# Altium PCB PCB_2021-11-04.pcbdoc
Units mil, origin at the board's own origin, x right, y up, seen from the top; angles counter-clockwise.
Board outline 4580 x 2695 mil, 2 copper layers (Top Layer, Bottom Layer); 44 components, 37 nets, 165 pads, 207 vias.
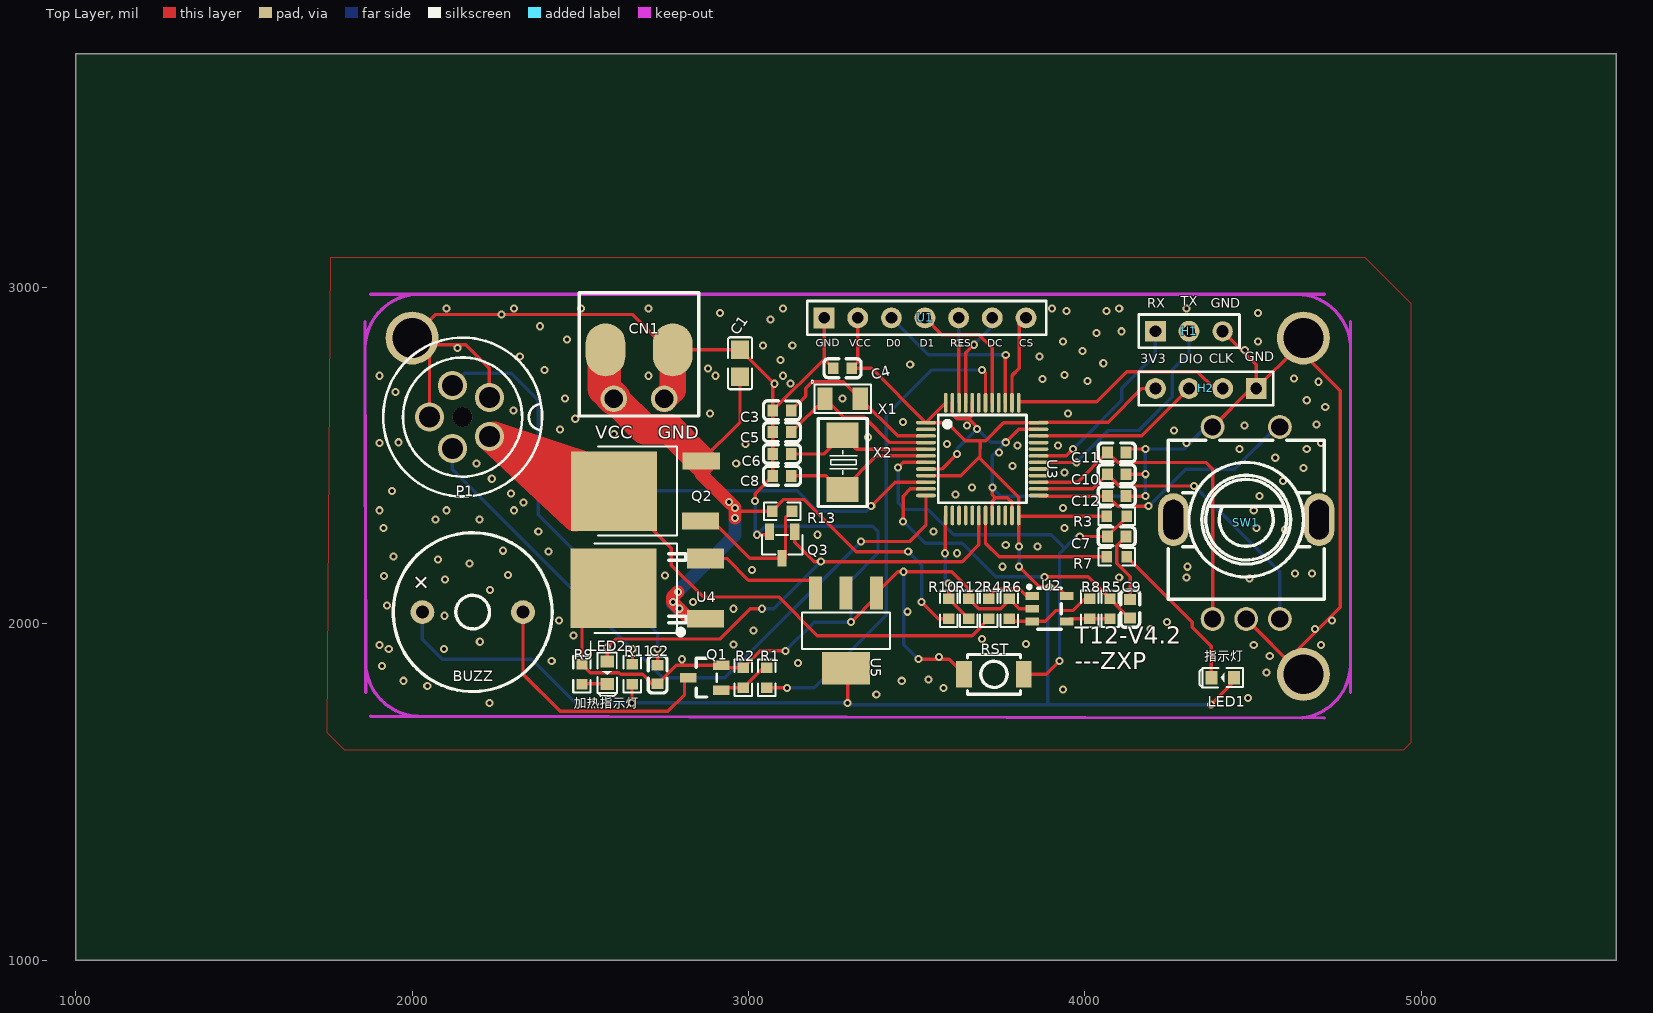
[diagram p0: Top Layer view]
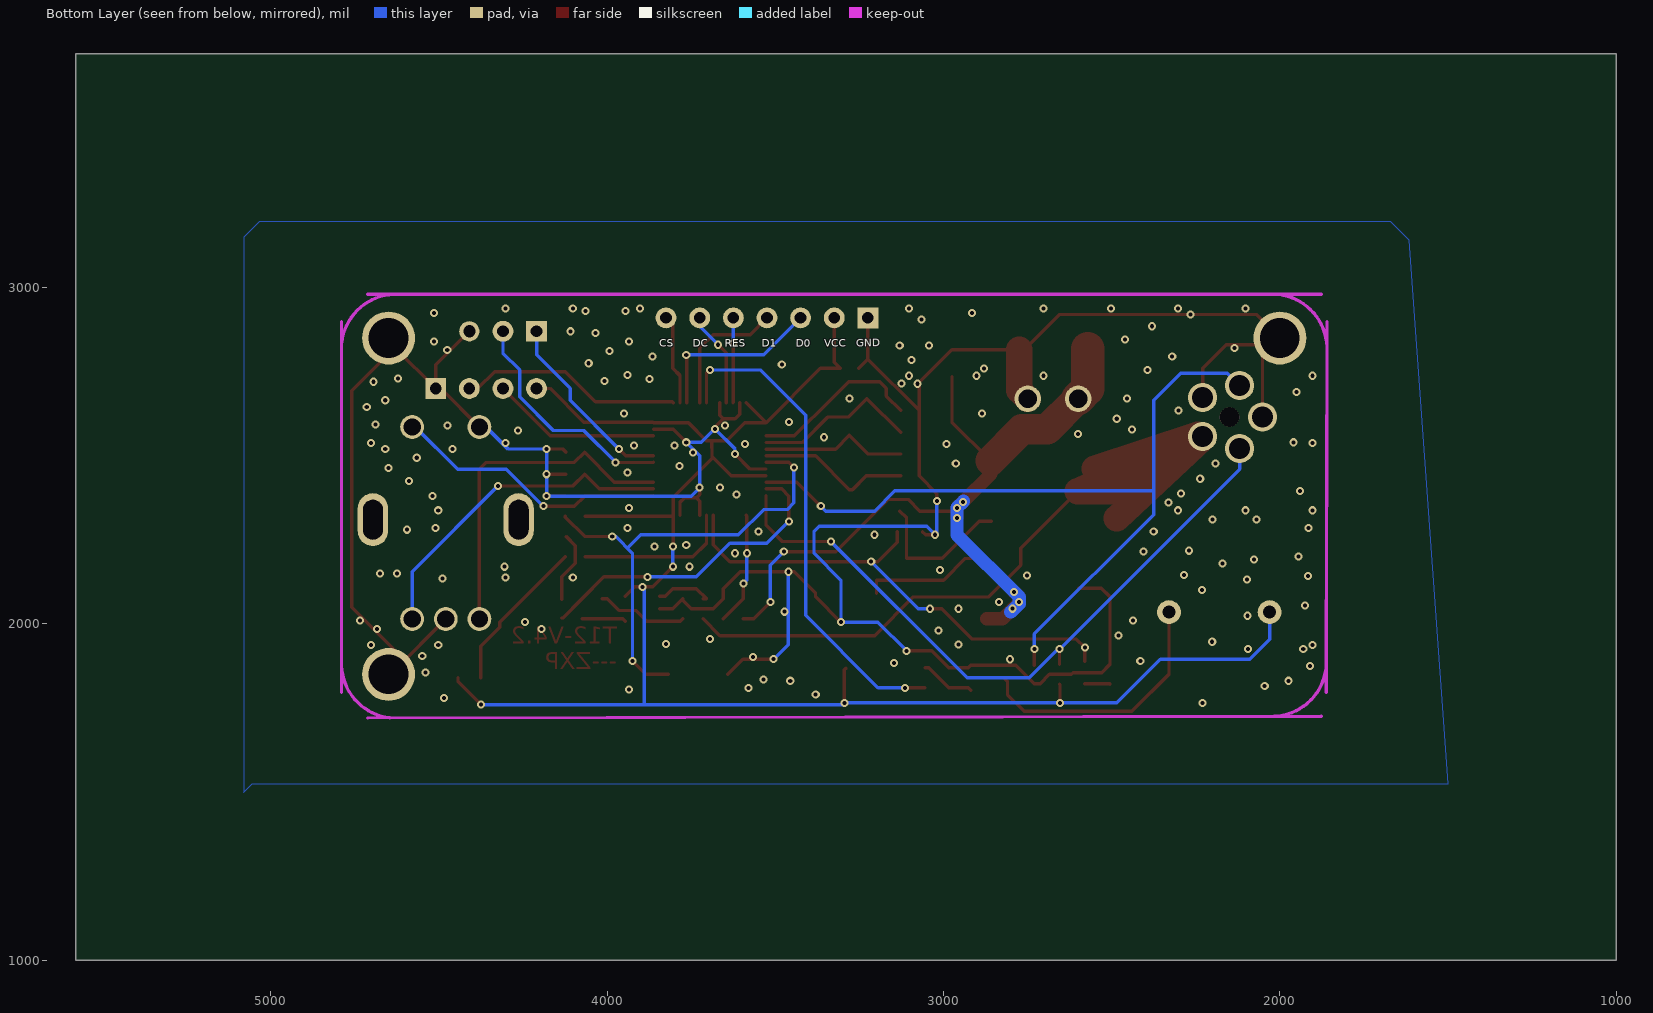
[diagram p1: Bottom Layer view, seen from below]

## Layer stack, top to bottom
Top Layer: signal copper (thickness not stored)
Dielectric: dielectric 12.6, FR-4, Dk 4.8
Bottom Layer: signal copper (thickness not stored)

## Board outline
5580,1000 1000,1000 1000,3695 5580,3695

## Components (designator, comment, footprint, x,y, rotation, side; value= is the part's Value field where it differs from the comment)
BUZZ "TMB12A12" BUZ-TH_BD12.0-P7.60-D0.6-FD 2180,2035 r0 top
C1 "10u" C0805 2975,2775 r270 top
C2 "0.1u" C0603 2730,1850 r90 top
C3 "10p" C0603 3100,2635 r0 top
C4 "0.1u" C0603 3280,2760 r0 top
C5 "10p" C0603 3100,2570 r0 top
C6 "10p" C0603 3100,2505 r0 top
C7 "0.1u" C0603 4095,2260 r0 top
C8 "10p" C0603 3100,2440 r0 top
C9 "0.1u" C0603 4135,2045 r270 top
C10 "0.1u" C0603 4095,2445 r0 top
C11 "0.1u" C0603 4095,2510 r180 top
C12 "0.1u" C0603 4095,2380 r0 top
CN1 "31382102" CONN-TH_2P-P3.81_31382102 2674.5,2669.4 r0 top
H1 "HDR-F-2.54" HDR-F-2.54_1X3 4310,2870 r0 top
H2 "HDR-F-2.54" HDR-F-2.54_1X4 4360,2700 r180 top
LED1 "0805_B" LED0603_BLUE 4410,1840 r180 top
LED2 "0805" LED0603_GREEN 2580,1855 r270 top
P1 "GX12-5" GX12-5 2150,2615 r270 top
Q1 "S8050" SOT-23-3_L2.9-W1.3-P1.90-LS2.4-TR 2870,1840 r0 top
Q2 "WSF45P06" TO-252-2_L6.6-W6.1-P4.57-LS9.9-TL-CW 2730,2395 r180 top
Q3 "2N7002" SOT-23-3_L2.9-W1.3-P1.90-LS2.4-BR 3100,2235 r90 top
R1 "1k" R0603 3055,1840 r90 top
R2 "10k" R0603 2985,1840 r270 top
R3 "10k" R0603 4095,2320 r180 top
R4 "10k" R0603 3715,2045 r90 top
R5 "10k" R0603 4075,2045 r90 top
R6 "1k" R0603 3775,2045 r270 top
R7 "1k" R0603 4095,2200 r0 top
R8 "100k" R0603 4015,2045 r270 top
R9 "1k" R0603 2505,1850 r270 top
R10 "200k" R0603 3595,2045 r270 top
R11 "10k" R0603 2655,1850 r90 top
R12 "10k" R0603 3655,2045 r270 top
R13 "10k" R0603 3100,2335 r180 top
RST "TSA343G00-250J2" SW-SMD_L4.0-W2.9-LS5.0 3730,1850 r0 top
SW1 "EC11" SW-TH_EC11XXXXXXXX 4480,2300 r0 top
U1 "OLED" HDR-M-2.54_1X7 3525,2910 r0 top
U2 "SGM321YN5/TR" SOT-23-5_L3.0-W1.7-P0.95-LS2.8-BR 3895,2045 r180 top
U3 "STM32F103C8T6" LQFP-48_L7.0-W7.0-P0.50-LS9.0-BL 3695,2490 r270 top
U4 "78M05" TO-252-2_L6.5-W6.1-P4.58-LS10.0-TL 2735,2105 r180 top
U5 "AMS1117-3.3V" SOT-223-4_L6.5-W3.5-P2.30-LS7.0-BR 3290,1980 r90 top
X1 "32.768KHz" OSC-SMD_2P-L3.2-W1.5 3280,2670 r0 top
X2 "8M" OSC-SMD_L5.0-W3.2 3280,2480 r90 top

## Footprints (in the part's own frame and the unit in brackets; to place one, negate y for a bottom-side part, rotate by r counter-clockwise, add the part's x,y. Pads: shape width x height; smd on the part's side, far side on the other; paste and mask are expansions set on the pad)
BUZ-TH_BD12.0-P7.60-D0.6-FD [mm]
  round 1.8 hole 1: 1(-3.8,0) 2(3.8,0)
  silkscreen extent -6,-6 6,6
C0603 [mm]
  rect 0.8x0.9 smd: 1(-0.7,0) 2(0.7,0)
  silkscreen extent -1.41,-0.71 1.39,0.72
C0805 [mm]
  rect 1.41x1.35 smd: 1(-1.03,0) 2(1.03,0)
  silkscreen extent -1.96,-0.9 1.96,0.9
CONN-TH_2P-P3.81_31382102 [mm]
  round 2 hole 1.4: 1(-1.905,0) 2(1.905,0)
  silkscreen extent -4.5,-1.3 4.5,8
GX12-5 [mm]
  round 2.2 hole 1.6: 1(1.471,2.022) 2(2.377,-0.772) 3(0,-2.499) 4(-2.377,-0.772) 5(-1.471,2.022)
  round 1.5 hole 1.5 unplated: ""(0,0)
  silkscreen extent -6,-6 6,6
HDR-F-2.54_1X3 [mil]
  rect 62x62 hole 35: 1(-100,0)
  round 62 hole 35: 2(0,0)
  round 60 hole 36: 3(100,0)
  silkscreen extent -150,-49 150,50
HDR-F-2.54_1X4 [mil]
  rect 62x62 hole 35: 1(-150,0)
  round 62 hole 35: 2(-50,0) 3(50,0) 4(150,0)
  silkscreen extent -200,-50 200,50
HDR-M-2.54_1X7 [mil]
  rect 62x62 hole 35: 1(-300,0)
  round 62 hole 35: 2(-200,0) 3(-100,0) 4(0,0) 5(100,0) 6(200,0) 7(300,0)
  silkscreen extent -350,-50 360,50
LED0603_BLUE [mm]
  rect 0.9x1 smd: 1(-0.85,0) 2(0.85,0)
  silkscreen extent -1.54,-0.73 1.75,0.73
LED0603_GREEN [mm]
  rect 0.9x1 smd: 1(-0.85,0) 2(0.85,0)
  silkscreen extent -1.54,-0.73 1.75,0.73
LQFP-48_L7.0-W7.0-P0.50-LS9.0-BL [mm]
  oval 0.27x1.5 smd: 1(-2.75,-4.25) 2(-2.25,-4.25) 3(-1.75,-4.25) 4(-1.25,-4.25) 5(-0.75,-4.25) 6(-0.25,-4.25) 7(0.25,-4.25) 8(0.75,-4.25) 9(1.25,-4.25) 10(1.75,-4.25) 11(2.25,-4.25) 12(2.75,-4.25) 25(2.75,4.25) 26(2.25,4.25) 27(1.75,4.25) 28(1.25,4.25) 29(0.75,4.25) 30(0.25,4.25) 31(-0.25,4.25) 32(-0.75,4.25) 33(-1.25,4.25) 34(-1.75,4.25) 35(-2.25,4.25) 36(-2.75,4.25)
  oval 1.5x0.27 smd: 13(4.25,-2.75) 14(4.25,-2.25) 15(4.25,-1.75) 16(4.25,-1.25) 17(4.25,-0.75) 18(4.25,-0.25) 19(4.25,0.25) 20(4.25,0.75) 21(4.25,1.25) 22(4.25,1.75) 23(4.25,2.25) 24(4.25,2.75) 37(-4.25,2.75) 38(-4.25,2.25) 39(-4.25,1.75) 40(-4.25,1.25) 41(-4.25,0.75) 42(-4.25,0.25) 43(-4.25,-0.25) 44(-4.25,-0.75) 45(-4.25,-1.25) 46(-4.25,-1.75) 47(-4.25,-2.25) 48(-4.25,-2.75)
  silkscreen extent -3.33,-3.31 3.3,3.34
OSC-SMD_2P-L3.2-W1.5 [mm]
  rect 1.15x1.7 smd: 1(-1.325,0) 2(1.325,0)
  silkscreen extent -2.39,-1.08 2.13,1.37
OSC-SMD_L5.0-W3.2 [mm]
  rect 1.9x2.4 smd: 1(-2.05,0) 2(2.05,0)
  silkscreen extent -3.32,-1.85 3.33,1.85
R0603 [mil]
  rect 31.75x34.02 smd: 1(-29.65,0) 2(29.65,0)
  silkscreen extent -55,-26 55,26
SOT-23-3_L2.9-W1.3-P1.90-LS2.4-BR [mm]
  rect 1.25x0.7 smd: 1(1,-0.95) 2(1,0.95) 3(-1,0)
  silkscreen extent -0.73,-1.53 0.73,1.53
SOT-23-3_L2.9-W1.3-P1.90-LS2.4-TR [mm]
  rect 1.25x0.7 smd: 1(1.25,0.95) 2(1.25,-0.95) 3(-1.25,0)
  silkscreen extent -0.65,-1.46 0.9,1.46
SOT-23-5_L3.0-W1.7-P0.95-LS2.8-BR [mm]
  rect 1x0.6 smd: 1(1.3,-0.95) 2(1.3,0) 3(1.3,0.95) 4(-1.3,0.95) 5(-1.3,-0.95)
  silkscreen extent -0.9,-1.78 1.65,1.55
SOT-223-4_L6.5-W3.5-P2.30-LS7.0-BR [mm]
  rect 2.47x0.98 smd: 1(2.835,-2.3) 2(2.835,0) 3(2.835,2.3)
  rect 2.47x3.6 smd: 4(-2.835,0)
  silkscreen extent -1.37,-3.33 1.37,3.33
SW-SMD_L4.0-W2.9-LS5.0 [mm]
  rect 1.2x2 smd: 1(-2.25,0) 2(2.25,0)
  silkscreen extent -2,-1.5 2,1.5
SW-TH_EC11XXXXXXXX [mm]
  oval 2.3x4 hole 1.5 slot 3 at 90 deg: 6(5.5,0.25) 7(-5.5,0.25)
  round 1.8 hole 1.3: A(-2.54,-7.25) B(2.54,-7.25) C(0,-7.25) D(-2.54,7.25) E(2.54,7.25)
  silkscreen extent -5.9,-5.75 5.9,6.25
TO-252-2_L6.5-W6.1-P4.58-LS10.0-TL [mm]
  rect 2.8x1.35 smd: 1(-3.475,2.275)
  rect 2.8x1.5 smd: 3(-3.475,-2.275)
  rect 6.5x6 smd: 4(3.475,-0.017)
  silkscreen extent -2.01,-3.39 4.9,3.48
TO-252-2_L6.6-W6.1-P4.57-LS9.9-TL-CW [mm]
  rect 2.8x1.3 smd: 1(-3.251,2.273) 3(-3.292,-2.273)
  rect 6.5x6 smd: 2(3.292,0)
  silkscreen extent -1.46,-3.35 4.51,3.34

## Free pads (board coordinates)
  round 157.48 hole 118.11: 1(2000,2850) 1(4650,1850) 1(4650,2850)
  oval 118.11x157.48 smd: 3(2775,2815) 4(2575,2815)

## Via types
v1: diameter 24, hole 12, Top Layer to Bottom Layer, 182 vias
v2: diameter 24.02, hole 12.01, Top Layer to Bottom Layer, 25 vias

## Nets (pads, with @x,y where several pads share a name; then routed paths per layer and width w, separated by ;. In a path a pad name is that pad's centre, name@x,y a point inside that pad or via, vN(x,y) a via of type N, cw(c..) or ccw(c..) an arc to the next point about the centre after c; other vN are vias at no path point)
+3V3: BUZZ.1 C4.2 H2.4 LED1.1 R3.2 R11.1 U1.2 U2.5 U3.1 U3.9 U3.24 U3.36 U3.48 U5.4 | length 5486.6
  Top Layer w10: v1(2653.84,1765) 2653.84,1819.18 R11.1 ; U5.4 3295,1863.39 v1(3295,1765) ; U1.2 3325,2777.44 C4.2 3365.95,2760 U3.1 U3.48 ; U3.9 3630.79,2440.79 3688.61,2498.61 ; U3.1 3591.7,2598.3 3645,2545 3705,2545 3758.3,2598.3 U3.36 ; 3689,2545 3688.61,2498.61 ; v1(3805,2170) 3865,2110 v1(3895,2110) 3918.6,2110 U2.5 ; v1(3805,2230) 3803.27,2231.73 U3.24 ; U3.36 3864.05,2600 4070,2600 4170,2700 H2.4 ; R3.2 3805.95,2320 U3.24 ; v1(4375,1760) 4443.47,1828.47 LED1.1 ; 3688.61,2498.61 3688.61,2491.39 3803.27,2376.73 U3.24
  Bottom Layer w10: BUZZ.1 2030.4,1954.6 2090,1895 2355,1895 2415,1835 2485,1765 v1(2653.84,1765) v1(3295,1765) 3300,1760 v1(4375,1760) ; v1(3805,2170) v1(3805,2230) ; 3875.9,1760 3890,1760 3890,2105 v1(3895,2110)
+5V: U4.3 U5.3 | length 392.8
  Top Layer w10: U4.3 2935.4,2194.6 3000,2130 3199.4,2130 U5.3
BUZZ: R1.1 U3.42 | length 1481.7
  Top Layer w10: R1.1 v1(3115,1810) ; v1(3695,2755) 3704.84,2745.16 U3.42
  Bottom Layer w10: v1(3115,1810) 3195,1810 3410,2025 3410,2620 3545,2755 v1(3695,2755)
BUZZ_2: BUZZ.2 Q1.3 | length 785.9
  Top Layer w10: BUZZ.2 2329.6,1850.4 2440,1740 2760,1740 2810,1790 2810,1829.2 Q1.3
CTRL-WSF: Q2.1 Q3.3 R13.1 | length 445.1
  Top Layer w10: Q2.1 2894.5,2305.5 3004.4,2195.6 Q3.3 3110,2195.6 3110,2315.3 R13.1
EC-CLK: C10.1 SW1.B U3.26 | length 996.3
  Top Layer w10: U3.26 4023.86,2401.42 C10.1 4102.44,2410 v1(4325,2410)
  Bottom Layer w10: v1(4325,2410) 4580,2155 SW1.B
EC-DT: C11.2 SW1.A U3.27 | length 1020.7
  Top Layer w10: U3.27 3978.54,2421.1 C11.2 4097.44,2480 4360,2480 4380,2460 SW1.A
EC-SW: C12.1 SW1.E U3.25 | length 828.3
  Top Layer w10: U3.25 3864.05,2380 C12.1 4097.44,2350 v1(4190,2350)
  Bottom Layer w10: v1(4190,2350) 4300,2460 4445,2460 4570.43,2585.43 SW1.E
GND: C1.1 C2.1 C3.1 C4.1 C5.1 C6.1 C7.2 C8.1 C9.1 C10.2 C11.1 C12.2 CN1.2 H1.3 H2.1 P1.3 P1.5 pad.1 pad.3 Q1.1 Q3.2 R2.1 R6.1 R9.1 R12.1 RST.1 SW1.C SW1.D U1.1 U2.2 U3.8 U3.20 U3.23 U3.35 U3.44 U3.47 U4.4 U5.1 | length 9897.9
  Top Layer w10: P1.3 2051.6,2798.4 pad.1@2000,2850 ; P1.5 2229.6,2760.4 2160,2830 2020,2830 pad.1@2000,2850 ; R9.1 2529.66,1855 2615,1855 2620,1850 2685,1850 2712.56,1822.44 C2.1 2784.96,1877.4 Q1.1 2926.94,1869.66 R2.1 3035.34,1920 v1(3110,1920) ; R9.1 2505,2080 2530.7,2105.7 U4.4 ; C1.1@2975,2815.5 pad.3 2760,2815 2655,2920 v1(2265.26,2920) 2070,2920 pad.1@2000,2850 ; C1.1 3072.44,2718.11 C3.1 C8.1 3020,2387.56 v1(3020,2365) ; v1(3025,2265) 3053.23,2265 Q3.2 ; C3.1 3225,2787.4 ; U1.1 3225,2787.44 C4.1 ; v1(3305,2005) 3380.55,2080.55 U5.1 3443.94,2155 v1(3461.53,2155) 3605,2155 3655,2105 R12.1 3684.66,2045 3750,2045 3775,2070 R6.1 3804.66,2045 U2.2 ; v1(3505,1895) 3596.42,1895 RST.1 ; U3.8 3575.47,2460.47 v1(3620,2505) ; U3.47 3606.42,2623.58 3620,2610 3655,2610 ; U3.44 3665.47,2620.47 3655,2610 ; v1(3680,2580) 3680,2585 3655,2610 ; U3.20 3724.53,2365 3734.53,2375 ; v1(3725,2405) 3725,2384.53 3734.53,2375 ; v1(3765,2540) 3803.58,2578.58 U3.35 ; U3.23 3783.58,2361.42 3770,2375 3734.53,2375 ; C7.2 4095,2232.44 4095,2180 4135,2140 C9.1 ; C12.2 v1(4180,2380) ; C10.2 v1(4180,2445) ; C11.1 4132.56,2520 v1(4180,2520) ; SW1.D 4494.57,2700 H2.1 ; H1.3 4510,2770 H2.1 ; SW1.C 4633.31,1861.25 4633.31,1850 4633.31,1923.31 4760,2050 4760,2693.03 4633.31,2819.72 4629.72,2819.72 H2.1
  Top Layer w78.74: CN1.2 2775,2694.9 pad.3
  Bottom Layer w10: v1(3020,2365) 3020,2270 v1(3025,2265) 3050,2290 3370,2290 3385,2275 3385,2210 3305,2130 v1(3305,2005) 3195,2005 v1(3110,1920) ; v1(3461.53,2155) 3461.53,1938.47 v1(3505,1895) ; v1(3620,2505) 3620,2520 v1(3680,2580) 3720,2540 v1(3765,2540) 3725,2500 v1(3725,2405) 3750,2380 v1(4180,2380) v1(4180,2445) v1(4180,2520) 4295,2520 4360.43,2585.43 SW1.D
  other v1: 2230,1765 4485,1780 3380,1790 3935,1805 3580,1810 2045,1815 1974.41,1830.86 3455.74,1830.86 3535,1835 4540,1855 1910,1875 3147.74,1884.2 2415,1890 2802.41,1894.86 3566.41,1901.53 4550,1905 2095,1925 1930.41,1925.53 2955.74,1938.86 3825,1940 2201.08,1946.86 3695,1955 3015,1980 4195,1985 4685,1985 4245,2005 2437.08,2009.53 4735,2010 2095.74,2024.2 3473.08,2036.2 2955,2045 1925,2055 2835,2065 2231.74,2100.2 2097.08,2132.2 4490,2135 1915.74,2142.86 2751.74,2144.2 2285,2145 4625,2150 4675,2150 3010,2160 3755,2170 4305,2170 2170,2180 2077.08,2190.86 1945,2200 3620,2210 2405,2215 2270.41,2217.53 3860,2230 3765,2235 3205,2265 2375,2275 3550,2275 4595,2280 1915,2285 3940,2285 4510,2285 2070,2310 2200,2310 3935,2345 2330.5,2361.5 4520,2380 3615,2385 2293.74,2387.53 1940,2395 3665,2405 4590,2425 2236.74,2431.53 3940,2450 4650.27,2463.39 3785,2470 2191.74,2476.53 2963.6,2476.72 4566.27,2494.05 3745,2510 4460,2520 4660,2520 3800,2530 3920,2530 2990.6,2534.72 3590,2535 1960,2540 3355,2555 2600,2565 4265,2575 2439.82,2578.33 3650,2590 4475,2590 4688.94,2592.72 3460,2600 2485,2610 2885,2625 3950,2625 2300.74,2634.53 4715,2645 4660,2665 2455,2670 3280,2670 1950,2690 3076.94,2714.05 3124.94,2715.39 4695,2720 4007.6,2722.05 3874.27,2728.72 4622.27,2730.05 3940,2740 2393.74,2755.53 2880,2760 3480.94,2771.39 4055,2775 3095,2785 2320,2795 3865,2795 3992.94,2811.39 4475.6,2814.05 2135,2820 3043.6,2827.39 3130.27,2827.39 3935,2840 4515,2840 2460,2845 4035,2865 4108.94,2870.05 2380,2885 3065,2905 2915,2925 4515,2925 3945,2930 4065,2930
  other v2: 1902.37,1937.79 4502.37,1937.79 4702.37,1937.79 2480,1965 4102.37,2137.79 4302.37,2137.79 1902.37,2337.79 2102.37,2337.79 2302.37,2337.79 4502.37,2337.79 1902.37,2537.79 4302.37,2537.79 4702.37,2537.79 1902.37,2737.79 2702.37,2737.79 2902.37,2737.79 3102.37,2737.79 2102.37,2937.79 2302.37,2937.79 2502.37,2937.79 2702.37,2937.79 3102.37,2937.79 3902.37,2937.79 4102.37,2937.79 4302.37,2937.79
HEATPWM: LED2.1 Q3.1 U3.18 | length 1493.9
  Top Layer w10: LED2.1 v1(2580,1930) 2605,1955 2915,1955 3005,2045 v1(3040,2045) ; Q3.1 3137.4,2242.6 3195,2185 3635,2185 3685.2,2235.2 U3.18
  Bottom Layer w10: v1(3040,2045) 3075,2045 v1(3215,2185)
LED: R7.1 U3.19 | length 459.7
  Top Layer w10: U3.19 3704.8,2240.2 3745,2200 R7.1
LED1_2: LED1.2 R7.2 | length 464.3
  Top Layer w10: R7.2 4320,2004.7 4320,1989.5 4376.5,1933 LED1.2
LED2_2: LED2.2 R9.2 | length 75.5
  Top Layer w10: R9.2 2506.2,1821.54 LED2.2
NRST: C7.1 R3.1 RST.2 U3.7 | length 1429.7
  Top Layer w10: v1(3445,2465) 3460.16,2480.16 U3.7 ; RST.2 3885,1850 v1(3925,1890) ; v1@3990,2260 C7.1 4124.66,2317.22 R3.1
  Bottom Layer w10: v1(3445,2465) 3445,2360 3465,2340 3535,2340 3610,2265 3900,2265 3940,2225 ; v1(3925,1890) 3925,2210 3975,2260 v1(3985,2260)
NTC: P1.2 R11.2 U3.12 | length 2047.9
  Top Layer w10: R11.2 v1(2655,1925) ; v1(3335,2245) 3480,2245 3527.7,2292.7 U3.12
  Bottom Layer w10: P1.2 2119.6,2460.4 v1(2655,1925) 2660,1925 2745,1840 2930,1840 v1(3335,2245)
OLED-CS: U1.7 U3.38 | length 269.8
  Top Layer w10: U3.38 3783.58,2738.58 3805,2760 3805,2890 U1.7
OLED-DC: U1.6 U3.45 | length 285.5
  Top Layer w10: U3.45 3645.79,2805.79 v1(3670,2830)
  Bottom Layer w10: v1(3670,2830) 3725,2885 U1.6
OLED-RST: U1.5 U3.46 | length 253.1
  Top Layer w10: v1(3625,2835) 3625,2658.42 U3.46
  Bottom Layer w10: v1(3625,2835) U1.5
OLED-SCK: U1.3 U3.39 | length 528.7
  Top Layer w10: U3.39 3763.9,2798.9 v1(3765,2800)
  Bottom Layer w10: U1.3 3535,2800 v1(3765,2800)
OLED-SDA: U1.4 U3.41 | length 399.8
  Top Layer w10: U1.4 3575,2860 3685,2860 3724.5,2820.5 U3.41
OSC32_IN: C3.2 U3.3 X1.2 | length 515.3
  Top Layer w10: C3.2 3170,2677.44 3170,2700 3190,2720 3282.17,2720 X1.2 3443.27,2558.9 U3.3
OSC32_OUT: C5.2 U3.4 X1.1 | length 495.6
  Top Layer w10: C5.2 X1.1 ; X1.1 3282.83,2615 3345,2615 3420.79,2539.21 U3.4
OSC_IN: C6.2 U3.5 X2.2 | length 440.2
  Top Layer w10: C6.2 3224.3,2505 X2.2 3321.18,2519.53 U3.5
OSC_OUT: C8.2 U3.6 X2.1 | length 458.6
  Top Layer w10: C8.2 3230,2440 3270.7,2399.3 X2.1 3380.55,2499.84 U3.6
Q1_2: Q1.2 R1.2 R2.2 | length 163.6
  Top Layer w10: Q1.2 2926.94,1810.34 R2.2 3044.32,1869.66 R1.2
R4_2: R4.2 U2.1 | length 171.4
  Top Layer w10: R4.2 3704.66,2074.66 3735,2105 3805,2105 3827.6,2082.4 U2.1
R6_2: R6.2 R8.1 U2.3 | length 271
  Top Layer w10: R6.2 3782.74,2007.6 U2.3 3882.6,2007.6 3915,2040 3965,2040 3999.66,2074.66 R8.1
R8_2: R5.1 R8.2 U2.4 | length 132
  Top Layer w10: U2.4 3953.93,2015.34 R8.2 R5.1
SW: C2.2 P1.4 U3.10 | length 2458.4
  Top Layer w10: C2.2 v1(2730,1925) ; v1(3365,2350) 3436.1,2421.1 U3.10
  Bottom Layer w10: P1.4 2156,2745 2295,2745 2375,2665 2375,2325 2730,1970 v1(2730,1925) ; 2375,2340 2375,2346.9 ; 2375,2395.4 3144.6,2395.4 3205,2335 3350,2335 v1(3365,2350)
SWCLK: H2.2 U3.37 | length 665.8
  Top Layer w10: U3.37 3805.95,2660 4035,2660 4125,2750 4335,2750 4385,2700 H2.2
SWDIO: H2.3 U3.34 | length 506.1
  Top Layer w10: U3.34 4168.9,2558.9 H2.3
T12+: P1.1 Q2.2 R4.1 | length 2704.3
  Top Layer w10: Q2.2 2770,2225.4 2770,2175 2865,2080 3090,2080 3205,1965 3664.7,1965 R4.1
  Top Layer w78.74: P1.1 Q2.2 2463.66,2395 2357.46,2501.2 ; P1.1@2230.82,2551.53 Q2.2@2484.36,2313.86 ; P1.1@2244.55,2563 Q2.2@2550.4,2462
T12-ADC: C9.2 R5.2 U3.11 | length 945.7
  Top Layer w10: v1(3460,2305) 3460,2380 3481.4,2401.4 U3.11 ; v1(3880,2140) 4009.66,2140 R5.2 4132.22,2017.44 C9.2
  Bottom Layer w10: v1(3460,2305) 3525,2240 3635,2240 3735,2140 v1(3880,2140)
UART-RX: H1.1 U3.31 | length 562.5
  Top Layer w10: U3.31 3944.84,2499.84 v1(3965,2520)
  Bottom Layer w10: v1(3965,2520) 4110,2665 4110,2700 4210,2800 H1.1
UART-TX: H1.2 U3.30 | length 694.2
  Top Layer w10: U3.30 v1(3975,2480)
  Bottom Layer w10: v1(3975,2480) 4070,2575 4160,2575 4260,2675 4260,2755 4310,2805 H1.2
VCC: C1.2 CN1.1 pad.4 Q2.3 R10.2 R13.2 U4.1 | length 2604.2
  Top Layer w10: Q2.3 2975,2599.88 C1.2 ; v1(2960,2345) 2970,2335 R13.2 3105.34,2370 3165,2370 3320,2215 v1(3475,2215) ; v1(3515,2065) 3564.66,2015.34 R10.2
  Top Layer w39.37: v1(2790,2095) 2775,2080 v1(2775,2065) v1(2794.9,2045.1) 2824.6,2015.4 U4.1 ; Q2.3 2859.6,2445.4 v1(2942.11,2362.89) v1(2960,2345) v1(2960,2315)
  Top Layer w78.74: pad.4 2575,2693.9 CN1.1
  Top Layer w90.55: CN1.1@2599.95,2668.07 2602.17,2668.07 2692.17,2578.07 2766.99,2578.07 Q2.3@2859.58,2485.48
  Top Layer w100: pad.4@2571.21,2817.71 2571.21,2699.14 CN1.1@2601.21,2669.14
  Bottom Layer w10: v1(3475,2215) 3515,2175 v1(3515,2065)
  Bottom Layer w39.37: v1@2800,2035 2775,2060 2775,2080 2960,2265 v1(2960,2345) v1@2940.34,2364.66
VIN-ADC: R10.1 R12.2 U3.13 | length 337.3
  Top Layer w10: v1(3585,2210) 3585,2320.95 U3.13 ; R10.1 v1(3595,2120) ; R10.1 R12.2
  Bottom Layer w10: v1(3585,2210) 3585,2130 v1(3595,2120)
pads on no net: P1. SW1.6 SW1.7 U3.2 U3.14 U3.15 U3.16 U3.17 U3.21 U3.22 U3.28 U3.29 U3.32 U3.33 U3.40 U3.43 U5.2

## Polygon pours and split planes (outlines as drawn)
GND on Bottom Layer (solid): 1615,3140 1670,3195 5035,3195 5080,3150 5080,1500 5055,1525 1500,1525
GND on Top Layer (solid): 1758.44,3090.5 4832.51,3090.5 4969.55,2953.46 4969.55,1646.05 4947.33,1623.83 1799.18,1623.83 1747.33,1675.68

## Keep-outs
Keep-Out Layer:
  lines w10: 1860,2825 cw(c2022,2818.26) 2002.98,2979.28 ; 1862.83,1867.98 ccw(c2023.86,1887) 2017.12,1725 ; 4635,2980 cw(c4628.26,2818) 4789.28,2837.02 ; 4647.02,1720.72 ccw(c4628,1881.74) 4790,1875

## Other copper
Top Layer:
  text "T12-V4.2 / ---ZXP" at 3970,1864.41 h51.18

## Silkscreen, mask and mechanical layers (free items; w line width, h text height)
Top Overlay:
  text "TX" at 4285,2935 h49.21
  text "RX" at 4185,2930 h49.21
  text "GND" at 4375,2930 h49.21
  text "GND" at 3200,2815 h39.37 r1
  text "VCC" at 3300,2815 h39.37
  text "D0" at 3410,2815 h39.37
  text "D1" at 3510,2815 h39.37
  text "RES" at 3600,2815 h39.37
  text "DC" at 3710,2815 h39.37
  text "CS" at 3805,2815 h39.37
  text "GND" at 4475,2770 h49.21
  text "3V3" at 4165,2765 h49.21
  text "DIO" at 4280,2765 h49.21 r359
  text "CLK" at 4370,2765 h49.21 r1
  text "VCC" at 2545,2550.32 h39.37
  text "GND" at 2730,2550.32 h39.37
  text "指示灯" at 4355,1880 h49.21
  text "T12-V4.2 / ---ZXP" at 3970.09,1864.55 h51.18
  text "加热指示灯" at 2480,1740 h49.21
Bottom Overlay:
  text "GND" at 3260,2815 h39.37 r359
  text "VCC" at 3355,2815 h39.37
  text "D0" at 3440,2815 h39.37 r1
  text "D1" at 3540,2815 h39.37
  text "RES" at 3650,2815 h39.37
  text "DC" at 3745,2815 h39.37
  text "CS" at 3845,2815 h39.37

## Text inside footprints (layer, text, board x,y; h text height)
BUZZ: Top Overlay "+" at 2022.69,2086.82 h50 r45